# Altium PCB ProPrj_HTXStudio_OneHanded_Keyboard(1).PcbDoc (part 7 of 11)
Units mm, origin at the board's own origin, x right, y up, seen from the top; angles counter-clockwise.
Board outline 152.4 x 101.6 mm, 20 copper layers (F.Cu, F.Mask, B.Cu, B.Mask, In1.Cu, F.SilkS, In2.Cu, B.SilkS, F.Adhes, B.Adhes, F.Paste, B.Paste, Dwgs.User, Cmts.User, Eco1.User, Eco2.User, Edge.Cuts, Margin, B.CrtYd, F.CrtYd); 269 components, 0 nets, 747 pads, 1168 vias.
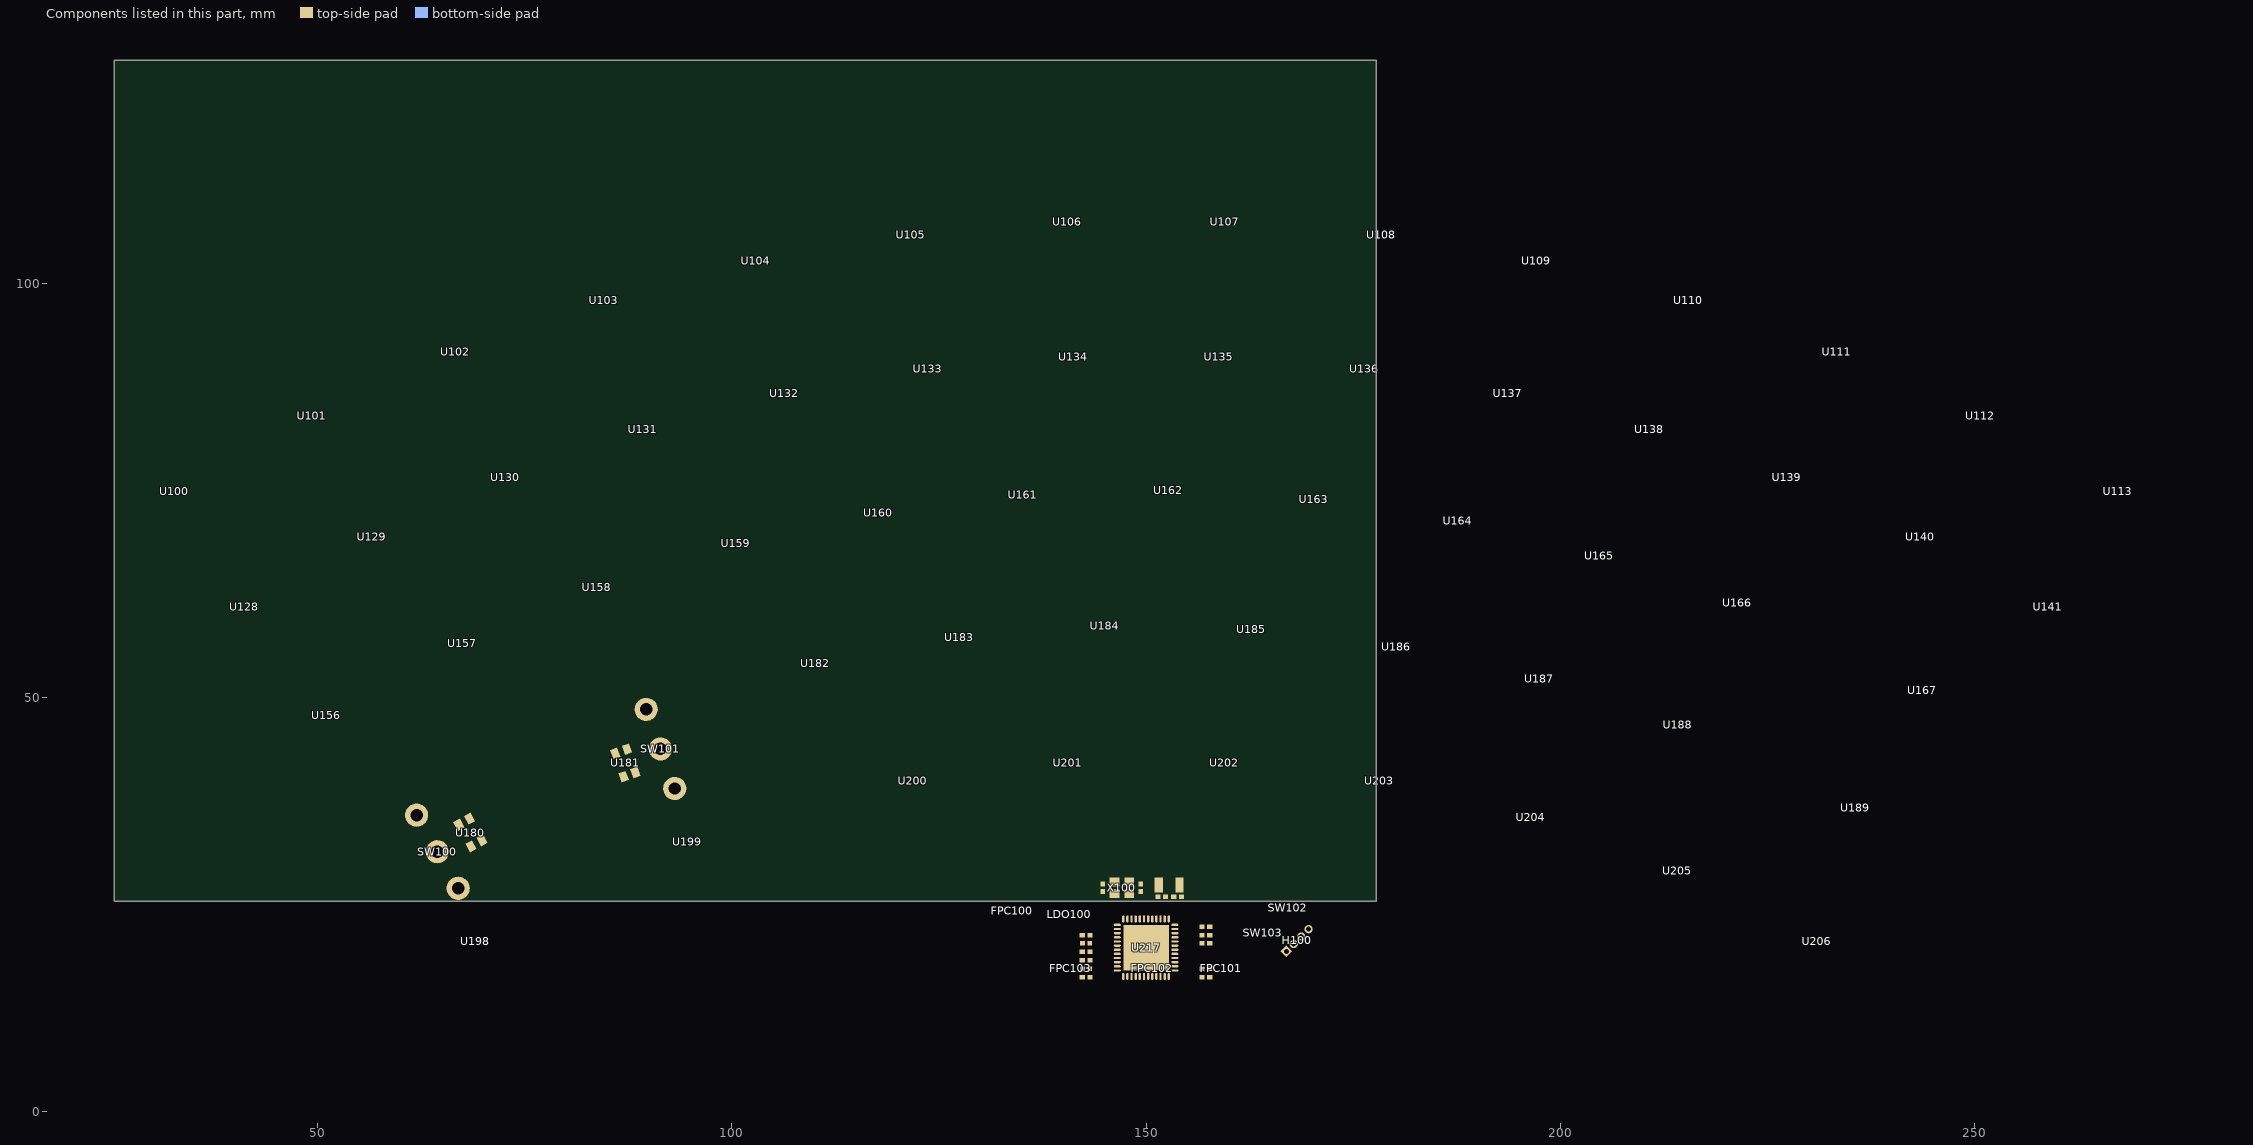
[diagram p19: the components of this part, seen from the top]

## Design rules (kind name [scope] priority, off if disabled: settings) (continued)
PolygonConnect Polygon_F.Cu--3_ConnectRelief45 [IsNamedPolygon('F.Cu--3') vs (IsThruPin or IsSMTPin) and (PadShape_AllLayers = 'Round')] p1214: connectstyle=Relief reliefconductorwidth=0.254 reliefentries=4 polygonreliefangle="45 Angle" airgapwidth=0.254
PolygonConnect Polygon_F.Cu--3_ConnectRelief90 [IsNamedPolygon('F.Cu--3') vs (IsThruPin or IsSMTPin) and (PadShape_AllLayers <> 'Round')] p1215: connectstyle=Relief reliefconductorwidth=0.254 reliefentries=4 polygonreliefangle="90 Angle" airgapwidth=0.254
PolygonConnect Polygon_F.Cu--2_ConnectDirect [IsNamedPolygon('F.Cu--2') vs IsVia] p1216: connectstyle=Direct reliefconductorwidth=0.254 reliefentries=4 polygonreliefangle="90 Angle" airgapwidth=0.254
PolygonConnect Polygon_F.Cu--2_ConnectRelief45 [IsNamedPolygon('F.Cu--2') vs (IsThruPin or IsSMTPin) and (PadShape_AllLayers = 'Round')] p1217: connectstyle=Relief reliefconductorwidth=0.254 reliefentries=4 polygonreliefangle="45 Angle" airgapwidth=0.254
PolygonConnect Polygon_F.Cu--2_ConnectRelief90 [IsNamedPolygon('F.Cu--2') vs (IsThruPin or IsSMTPin) and (PadShape_AllLayers <> 'Round')] p1218: connectstyle=Relief reliefconductorwidth=0.254 reliefentries=4 polygonreliefangle="90 Angle" airgapwidth=0.254
PolygonConnect Polygon_F.Cu--1_ConnectDirect [IsNamedPolygon('F.Cu--1') vs IsVia] p1219: connectstyle=Direct reliefconductorwidth=0.254 reliefentries=4 polygonreliefangle="90 Angle" airgapwidth=0.254
PolygonConnect Polygon_F.Cu--1_ConnectRelief45 [IsNamedPolygon('F.Cu--1') vs (IsThruPin or IsSMTPin) and (PadShape_AllLayers = 'Round')] p1220: connectstyle=Relief reliefconductorwidth=0.5 reliefentries=4 polygonreliefangle="45 Angle" airgapwidth=0.5
PolygonConnect Polygon_F.Cu--1_ConnectRelief90 [IsNamedPolygon('F.Cu--1') vs (IsThruPin or IsSMTPin) and (PadShape_AllLayers <> 'Round')] p1221: connectstyle=Relief reliefconductorwidth=0.5 reliefentries=4 polygonreliefangle="90 Angle" airgapwidth=0.5
PolygonConnect Polygon_F.Cu-_ConnectDirect [IsNamedPolygon('F.Cu-') vs IsVia] p1222: connectstyle=Direct reliefconductorwidth=0.254 reliefentries=4 polygonreliefangle="90 Angle" airgapwidth=0.254
PolygonConnect Polygon_F.Cu-_ConnectRelief45 [IsNamedPolygon('F.Cu-') vs (IsThruPin or IsSMTPin) and (PadShape_AllLayers = 'Round')] p1223: connectstyle=Relief reliefconductorwidth=0.254 reliefentries=4 polygonreliefangle="45 Angle" airgapwidth=0.254
PolygonConnect Polygon_F.Cu-_ConnectRelief90 [IsNamedPolygon('F.Cu-') vs (IsThruPin or IsSMTPin) and (PadShape_AllLayers <> 'Round')] p1224: connectstyle=Relief reliefconductorwidth=0.254 reliefentries=4 polygonreliefangle="90 Angle" airgapwidth=0.254
RoutingVias [All] p1: holewidth=0.711 width=1.27 viastyle="Through Hole" minholewidth=0.711 minwidth=1.27 maxholewidth=0.711 maxwidth=1.27
SilkToSilkClearance [All] p1: silktosilkclearance=0
SilkToSolderMaskClearance [IsPad] p1: minsilkscreentomaskgap=0 clearancetoexposedcopper=TRUE
SolderMaskExpansion [All] p1: expansion=0 istentingtop=FALSE
Width [All] p1: maxlimit=10 minlimit=0.254 preferedwidth=0.254 toplayer_prefwidth=0.2 midlayer1_maxwidth=0.254 midlayer2_prefwidth=0.2 midlayer3_maxwidth=0.254 midlayer4_prefwidth=0.2 midlayer5_prefwidth=0.2 midlayer6_prefwidth=0.2 midlayer7_prefwidth=0.2 midlayer9_maxwidth=0.254 midlayer11_maxwidth=0.254 midlayer13_prefwidth=0.2 midlayer15_prefwidth=0.2 midlayer17_prefwidth=0.2 midlayer19_maxwidth=0.254 midlayer21_maxwidth=0.254 midlayer23_prefwidth=0.2 midlayer25_prefwidth=0.2 midlayer27_maxwidth=0.254 midlayer29_prefwidth=0.2 bottomlayer_prefwidth=0.2 minimp=50.000000 maximp=50.000000 favimp=50.000000
27 further rules are at their usual default settings.

## Components (designator, comment, footprint, x,y, rotation, side; value= is the part's Value field where it differs from the comment)
C100 "Comment" C0603 37.086,77.627 r301.2 top value=100nF
C101 "Comment" C0603 53.924,86.386 r296.4 top value=100nF
C102 "Comment" C0603 71.436,93.706 r291.6 top value=100nF
C103 "Comment" C0603 89.5,99.534 r286.8 top value=100nF
C104 "Comment" C0603 107.987,103.831 r282 top value=100nF
C105 "Comment" C0603 126.77,106.565 r277.2 top value=100nF
C106 "Comment" C0603 145.715,107.719 r272.4 top value=100nF
C107 "Comment" C0603 164.69,107.282 r267.6 top value=100nF
C108 "Comment" C0603 183.563,105.26 r262.8 top value=100nF
C109 "Comment" C0603 202.199,101.666 r258 top value=100nF
C110 "Comment" C0603 220.47,96.524 r253.2 top value=100nF
C111 "Comment" C0603 238.247,89.872 r248.4 top value=100nF
C112 "Comment" C0603 255.404,81.756 r243.6 top value=100nF
C113 "Comment" C0603 271.822,72.232 r238.8 top value=100nF
C114 "Comment" C0603 45.539,63.668 r301.2 top value=100nF
C115 "Comment" C0603 61.18,71.769 r296.4 top value=100nF
C116 "Comment" C0603 77.444,78.532 r291.6 top value=100nF
C117 "Comment" C0603 94.216,83.911 r286.8 top value=100nF
C118 "Comment" C0603 111.38,87.868 r282 top value=100nF
C119 "Comment" C0603 128.815,90.374 r277.2 top value=100nF
C120 "Comment" C0603 146.398,91.414 r272.4 top value=100nF
C121 "Comment" C0603 164.007,90.977 r267.6 top value=100nF
C122 "Comment" C0603 181.517,89.069 r262.8 top value=100nF
C123 "Comment" C0603 198.807,85.703 r258 top value=100nF
C124 "Comment" C0603 215.754,80.901 r253.2 top value=100nF
C125 "Comment" C0603 232.239,74.698 r248.4 top value=100nF
C126 "Comment" C0603 248.148,67.138 r243.6 top value=100nF
C127 "Comment" C0603 263.369,58.273 r238.8 top value=100nF
C128 "Comment" C0603 55.451,50.53 r300.71 top value=100nF
C129 "Comment" C0603 72.141,58.821 r295.2 top value=100nF
C130 "Comment" C0603 88.565,65.146 r290 top value=100nF
C131 "Comment" C0603 105.496,69.956 r284.8 top value=100nF
C132 "Comment" C0603 122.793,73.213 r279.6 top value=100nF
C133 "Comment" C0603 140.313,74.888 r274.4 top value=100nF
C134 "Comment" C0603 157.915,74.969 r269.2 top value=100nF
C135 "Comment" C0603 175.449,73.454 r264 top value=100nF
C136 "Comment" C0603 192.775,70.355 r258.8 top value=100nF
C137 "Comment" C0603 209.749,65.7 r253.6 top value=100nF
C138 "Comment" C0603 226.232,59.525 r248.4 top value=100nF
C139 "Comment" C0603 248.299,48.382 r241.09 top value=100nF
C140 "Comment" C0603 115.12,55.36 r283 top value=100nF
C141 "Comment" C0603 132.597,57.963 r277.3 top value=100nF
C142 "Comment" C0603 150.246,58.817 r271.6 top value=100nF
C143 "Comment" C0603 167.892,57.914 r265.9 top value=100nF
C144 "Comment" C0603 185.362,55.263 r260.2 top value=100nF
C145 "Comment" C0603 202.482,50.89 r254.5 top value=100nF
C146 "Comment" C0603 219.083,44.838 r248.8 top value=100nF
C147 "Comment" C0603 240.234,34.2 r241.16 top value=100nF
C148 "Comment" C0603 73.492,23.216 r300.15 top value=100nF
C149 "Comment" C0603 99.461,34.387 r290.1 top value=100nF
C150 "Comment" C0603 126.981,40.855 r280.05 top value=100nF
C151 "Comment" C0603 145.773,42.45 r273.35 top value=100nF
C152 "Comment" C0603 164.623,41.841 r266.65 top value=100nF
C153 "Comment" C0603 183.273,39.038 r259.95 top value=100nF
C154 "Comment" C0603 201.47,34.077 r253.25 top value=100nF
C155 "Comment" C0603 218.962,27.028 r246.55 top value=100nF
C156 "Comment" C0603 235.513,17.986 r239.85 top value=100nF
C157 "Comment" C0402#1 142.761,21.34 r180 top value=100nF
C158 "Comment" C0402#1 142.761,19.308 r180 top value=100nF
C159 "Comment" C0402#2 162.192,24.007 r225 top value=100nF
C160 "Comment" C0402#1 142.761,16.26 r0 top value=100nF
C161 "Comment" C0402#1 142.761,18.292 r0 top value=100nF
C162 "Comment" C0402#1 157.239,20.324 r180 top value=100nF
C163 "Comment" C0402#1 157.239,17.276 r180 top value=100nF
C164 "Comment" C0402#1 157.239,22.356 r180 top value=100nF
C165 "Comment" C0402#1 157.239,21.34 r180 top value=1uF
C166 "Comment" C0402#1 157.239,16.26 r180 top value=1uF
C167 "Comment" C0402#3 141.745,26.547 r0 top value=100nF
C168 "Comment" C0402#4 139.586,26.547 r180 top value=1uF
C169 "Comment" C0402#4 141.745,21.213 r180 top value=1uF
C170 "Comment" C0402#1 153.81,25.987 r0 top value=6pF
C171 "Comment" C0402#1 144.793,27.055 r90 top value=20pF
C172 "Comment" C0402#1 149.365,27.055 r90 top value=20pF
C173 "Comment" C0402#1 151.905,25.987 r180 top value=6pF
D100 "Comment" SOD-323_L1.8-W1.3-LS2.5-RD 33.076,60.351 r31.2 top value=1N4148WS
D101 "Comment" SOD-323_L1.8-W1.3-LS2.5-RD 48.483,69.507 r26.4 top value=1N4148WS
D102 "Comment" SOD-323_L1.8-W1.3-LS2.5-RD 64.602,77.341 r21.6 top value=1N4148WS
D103 "Comment" SOD-323_L1.8-W1.3-LS2.5-RD 81.32,83.799 r16.8 top value=1N4148WS
D104 "Comment" SOD-323_L1.8-W1.3-LS2.5-RD 98.52,88.835 r12 top value=1N4148WS
D105 "Comment" SOD-323_L1.8-W1.3-LS2.5-RD 116.08,92.414 r7.2 top value=1N4148WS
D106 "Comment" SOD-323_L1.8-W1.3-LS2.5-RD 133.879,94.512 r2.4 top value=1N4148WS
D107 "Comment" SOD-323_L1.8-W1.3-LS2.5-RD 151.791,95.112 r357.6 top value=1N4148WS
D108 "Comment" SOD-323_L1.8-W1.3-LS2.5-RD 169.69,94.212 r352.8 top value=1N4148WS
D109 "Comment" SOD-323_L1.8-W1.3-LS2.5-RD 187.451,91.817 r348 top value=1N4148WS
D110 "Comment" SOD-323_L1.8-W1.3-LS2.5-RD 204.95,87.944 r343.2 top value=1N4148WS
D111 "Comment" SOD-323_L1.8-W1.3-LS2.5-RD 222.062,82.621 r338.4 top value=1N4148WS
D112 "Comment" SOD-323_L1.8-W1.3-LS2.5-RD 238.67,75.884 r333.6 top value=1N4148WS
D113 "Comment" SOD-323_L1.8-W1.3-LS2.5-RD 254.656,67.781 r328.8 top value=1N4148WS
D114 "Comment" SOD-323_L1.8-W1.3-LS2.5-RD 41.531,46.392 r31.2 top value=1N4148WS
D115 "Comment" SOD-323_L1.8-W1.3-LS2.5-RD 55.739,54.889 r26.4 top value=1N4148WS
D116 "Comment" SOD-323_L1.8-W1.3-LS2.5-RD 70.61,62.167 r21.6 top value=1N4148WS
D117 "Comment" SOD-323_L1.8-W1.3-LS2.5-RD 86.037,68.176 r16.8 top value=1N4148WS
D118 "Comment" SOD-323_L1.8-W1.3-LS2.5-RD 101.913,72.872 r12 top value=1N4148WS
D119 "Comment" SOD-323_L1.8-W1.3-LS2.5-RD 118.126,76.224 r7.2 top value=1N4148WS
D120 "Comment" SOD-323_L1.8-W1.3-LS2.5-RD 134.562,78.206 r2.4 top value=1N4148WS
D121 "Comment" SOD-323_L1.8-W1.3-LS2.5-RD 151.108,78.807 r357.6 top value=1N4148WS
D122 "Comment" SOD-323_L1.8-W1.3-LS2.5-RD 167.645,78.021 r352.8 top value=1N4148WS
D123 "Comment" SOD-323_L1.8-W1.3-LS2.5-RD 184.058,75.854 r348 top value=1N4148WS
D124 "Comment" SOD-323_L1.8-W1.3-LS2.5-RD 200.233,72.321 r343.2 top value=1N4148WS
D125 "Comment" SOD-323_L1.8-W1.3-LS2.5-RD 216.055,67.447 r338.4 top value=1N4148WS
D126 "Comment" SOD-323_L1.8-W1.3-LS2.5-RD 231.413,61.266 r333.6 top value=1N4148WS
D127 "Comment" SOD-323_L1.8-W1.3-LS2.5-RD 246.201,53.822 r328.8 top value=1N4148WS
D128 "Comment" SOD-323_L1.8-W1.3-LS2.5-RD 51.293,33.29 r30.71 top value=1N4148WS
D129 "Comment" SOD-323_L1.8-W1.3-LS2.5-RD 66.348,42.059 r25.2 top value=1N4148WS
D130 "Comment" SOD-323_L1.8-W1.3-LS2.5-RD 81.278,48.978 r20 top value=1N4148WS
D131 "Comment" SOD-323_L1.8-W1.3-LS2.5-RD 96.772,54.516 r14.8 top value=1N4148WS
D132 "Comment" SOD-323_L1.8-W1.3-LS2.5-RD 112.706,58.626 r9.6 top value=1N4148WS
D133 "Comment" SOD-323_L1.8-W1.3-LS2.5-RD 128.946,61.276 r4.4 top value=1N4148WS
D134 "Comment" SOD-323_L1.8-W1.3-LS2.5-RD 145.36,62.443 r359.2 top value=1N4148WS
D135 "Comment" SOD-323_L1.8-W1.3-LS2.5-RD 161.812,62.117 r354 top value=1N4148WS
D136 "Comment" SOD-323_L1.8-W1.3-LS2.5-RD 178.166,60.302 r348.8 top value=1N4148WS
D137 "Comment" SOD-323_L1.8-W1.3-LS2.5-RD 194.289,57.011 r343.6 top value=1N4148WS
D138 "Comment" SOD-323_L1.8-W1.3-LS2.5-RD 210.047,52.274 r338.4 top value=1N4148WS
D139 "Comment" SOD-323_L1.8-W1.3-LS2.5-RD 231.323,43.248 r331.09 top value=1N4148WS
D140 "Comment" SOD-323_L1.8-W1.3-LS2.5-RD 52.591,31.246 r29.66 top value=1N4148WS
D141 "Comment" SOD-323_L1.8-W1.3-LS2.5-RD 85.484,47.248 r19.82 top value=1N4148WS
D142 "Comment" SOD-323_L1.8-W1.3-LS2.5-RD 105.916,40.201 r13 top value=1N4148WS
D143 "Comment" SOD-323_L1.8-W1.3-LS2.5-RD 121.933,43.793 r7.3 top value=1N4148WS
D144 "Comment" SOD-323_L1.8-W1.3-LS2.5-RD 138.227,45.776 r1.6 top value=1N4148WS
D145 "Comment" SOD-323_L1.8-W1.3-LS2.5-RD 154.638,46.131 r355.9 top value=1N4148WS
D146 "Comment" SOD-323_L1.8-W1.3-LS2.5-RD 171.003,44.855 r350.2 top value=1N4148WS
D147 "Comment" SOD-323_L1.8-W1.3-LS2.5-RD 187.16,41.959 r344.5 top value=1N4148WS
D148 "Comment" SOD-323_L1.8-W1.3-LS2.5-RD 202.95,37.474 r338.8 top value=1N4148WS
D149 "Comment" SOD-323_L1.8-W1.3-LS2.5-RD 223.265,29.046 r331.16 top value=1N4148WS
D150 "Comment" SOD-323_L1.8-W1.3-LS2.5-RD 69.167,6.017 r30.15 top value=1N4148WS
D151 "Comment" SOD-323_L1.8-W1.3-LS2.5-RD 92.201,18.207 r20.1 top value=1N4148WS
D152 "Comment" SOD-323_L1.8-W1.3-LS2.5-RD 117.009,26.19 r10.05 top value=1N4148WS
D153 "Comment" SOD-323_L1.8-W1.3-LS2.5-RD 134.158,29.048 r3.35 top value=1N4148WS
D154 "Comment" SOD-323_L1.8-W1.3-LS2.5-RD 151.524,29.886 r356.65 top value=1N4148WS
D155 "Comment" SOD-323_L1.8-W1.3-LS2.5-RD 168.869,28.693 r349.95 top value=1N4148WS
D156 "Comment" SOD-323_L1.8-W1.3-LS2.5-RD 185.956,25.483 r343.25 top value=1N4148WS
D157 "Comment" SOD-323_L1.8-W1.3-LS2.5-RD 202.553,20.303 r336.55 top value=1N4148WS
D158 "Comment" SOD-323_L1.8-W1.3-LS2.5-RD 218.431,13.221 r329.85 top value=1N4148WS
D159 "Comment" SOD-523_L1.2-W0.8-LS1.6-RD 139.332,21.213 r180 top value=ESD5Z3V3
FPC100 "Comment" FPC-SMD_8P-P0.50_XUNPU_FPC-05FB-8PH20#1 133.871,24.261 r180 top value=FPC-05FB-8PH20
FPC101 "Comment" FPC-SMD_8P-P0.50_XUNPU_FPC-05FB-8PH20#1 159.086,17.339 r180 top value=FPC-05FB-8PH20
FPC102 "Comment" FPC-SMD_8P-P0.50_XUNPU_FPC-05FB-8PH20#2 150.005,17.339 r180 top value=FPC-05FB-8PH20
FPC103 "Comment" FPC-SMD_8P-P0.50_XUNPU_FPC-05FB-8PH20#1 140.924,17.339 r180 top value=FPC-05FB-8PH20
H100 "Comment" HDR-TH_4P-P1.27-V-M 168.288,20.705 r45 top value=PZ127V-11-04-0720
LDO100 "Comment" SOT-23-5_L3.0-W1.7-P0.95-LS2.8-BL 140.729,23.88 r0 top value=ME6211C33M5G-N
LED100 "Comment" LED0603-RD_1 171.336,24.007 r45 top value=NCD0603G1
R100 "Comment" R0402#1 142.761,20.324 r0 top value=0Ω
R101 "Comment" R0402#1 142.761,17.276 r0 top value=0Ω
R102 "Comment" R0402#2 163.716,25.531 r45 top value=10kΩ
R103 "Comment" R0402#2 160.668,22.483 r225 top value=10kΩ
R104 "Comment" R0402#2 170.066,25.658 r315 top value=1kΩ
SW100 "Comment" SW-TH_K9-1267T 64.423,31.401 r119.66 top value=K9-1267T
SW101 "Comment" SW-TH_K9-1267T 91.362,43.815 r109.81 top value=K9-1267T
SW102 "Comment" SW-SMD_4P-L3.7-W3.7-P2.70-LS3.7 167.145,24.642 r45 top value="TS3735A 250gf 030"
SW103 "Comment" SW-SMD_4P-L3.7-W3.7-P2.70-LS3.7 164.097,21.594 r45 top value="TS3735A 250gf 030"
U100 "Comment" LED-SMD_L3.2-W2.8_YO-WS2812B-3528 32.631,74.929 r31.2 top value=Yo-WS2812B-3528反贴雾状
U101 "Comment" LED-SMD_L3.2-W2.8_YO-WS2812B-3528 49.26,84.071 r26.4 top value=Yo-WS2812B-3528反贴雾状
U102 "Comment" LED-SMD_L3.2-W2.8_YO-WS2812B-3528 66.595,91.789 r21.6 top value=Yo-WS2812B-3528反贴雾状
U103 "Comment" LED-SMD_L3.2-W2.8_YO-WS2812B-3528 84.514,98.029 r16.8 top value=Yo-WS2812B-3528反贴雾状
U104 "Comment" LED-SMD_L3.2-W2.8_YO-WS2812B-3528 102.894,102.748 r12 top value=Yo-WS2812B-3528反贴雾状
U105 "Comment" LED-SMD_L3.2-W2.8_YO-WS2812B-3528 121.604,105.913 r7.2 top value=Yo-WS2812B-3528反贴雾状
U106 "Comment" LED-SMD_L3.2-W2.8_YO-WS2812B-3528 140.513,107.5 r2.4 top value=Yo-WS2812B-3528反贴雾状
U107 "Comment" LED-SMD_L3.2-W2.8_YO-WS2812B-3528 159.487,107.5 r357.6 top value=Yo-WS2812B-3528反贴雾状
U108 "Comment" LED-SMD_L3.2-W2.8_YO-WS2812B-3528 178.397,105.913 r352.8 top value=Yo-WS2812B-3528反贴雾状
U109 "Comment" LED-SMD_L3.2-W2.8_YO-WS2812B-3528 197.106,102.748 r348 top value=Yo-WS2812B-3528反贴雾状
U110 "Comment" LED-SMD_L3.2-W2.8_YO-WS2812B-3528 215.485,98.029 r343.2 top value=Yo-WS2812B-3528反贴雾状
U111 "Comment" LED-SMD_L3.2-W2.8_YO-WS2812B-3528 233.405,91.789 r338.4 top value=Yo-WS2812B-3528反贴雾状
U112 "Comment" LED-SMD_L3.2-W2.8_YO-WS2812B-3528 250.74,84.071 r333.6 top value=Yo-WS2812B-3528反贴雾状
U113 "Comment" LED-SMD_L3.2-W2.8_YO-WS2812B-3528 267.369,74.929 r328.8 top value=Yo-WS2812B-3528反贴雾状
U114 "Comment" SMD_KEYBOARD-SW 37.561,67.967 r211.2 top value=CPG151101S11-16
U115 "Comment" SMD_KEYBOARD-SW 53.59,76.721 r206.4 top value=CPG151101S11-16
U116 "Comment" SMD_KEYBOARD-SW 70.294,84.102 r201.6 top value=CPG151101S11-16
U117 "Comment" SMD_KEYBOARD-SW 87.558,90.06 r196.8 top value=CPG151101S11-16
U118 "Comment" SMD_KEYBOARD-SW 105.26,94.552 r192 top value=CPG151101S11-16
U119 "Comment" SMD_KEYBOARD-SW 123.275,97.547 r187.2 top value=CPG151101S11-16
U120 "Comment" SMD_KEYBOARD-SW 141.478,99.025 r182.4 top value=CPG151101S11-16
U121 "Comment" SMD_KEYBOARD-SW 159.741,98.973 r177.6 top value=CPG151101S11-16
U122 "Comment" SMD_KEYBOARD-SW 177.935,97.394 r172.8 top value=CPG151101S11-16
U123 "Comment" SMD_KEYBOARD-SW 195.934,94.298 r168 top value=CPG151101S11-16
U124 "Comment" SMD_KEYBOARD-SW 213.61,89.707 r163.2 top value=CPG151101S11-16
U125 "Comment" SMD_KEYBOARD-SW 230.84,83.653 r158.4 top value=CPG151101S11-16
U126 "Comment" SMD_KEYBOARD-SW 247.503,76.178 r153.6 top value=CPG151101S11-16
U127 "Comment" SMD_KEYBOARD-SW 263.483,67.335 r148.8 top value=CPG151101S11-16
U128 "Comment" LED-SMD_L3.2-W2.8_YO-WS2812B-3528 41.086,60.97 r31.2 top value=Yo-WS2812B-3528反贴雾状
U129 "Comment" LED-SMD_L3.2-W2.8_YO-WS2812B-3528 56.516,69.453 r26.4 top value=Yo-WS2812B-3528反贴雾状
U130 "Comment" LED-SMD_L3.2-W2.8_YO-WS2812B-3528 72.602,76.615 r21.6 top value=Yo-WS2812B-3528反贴雾状
U131 "Comment" LED-SMD_L3.2-W2.8_YO-WS2812B-3528 89.232,82.407 r16.8 top value=Yo-WS2812B-3528反贴雾状
U132 "Comment" LED-SMD_L3.2-W2.8_YO-WS2812B-3528 106.287,86.785 r12 top value=Yo-WS2812B-3528反贴雾状
U133 "Comment" LED-SMD_L3.2-W2.8_YO-WS2812B-3528 123.649,89.722 r7.2 top value=Yo-WS2812B-3528反贴雾状
U134 "Comment" LED-SMD_L3.2-W2.8_YO-WS2812B-3528 141.196,91.195 r2.4 top value=Yo-WS2812B-3528反贴雾状
U135 "Comment" LED-SMD_L3.2-W2.8_YO-WS2812B-3528 158.805,91.195 r357.6 top value=Yo-WS2812B-3528反贴雾状
U136 "Comment" LED-SMD_L3.2-W2.8_YO-WS2812B-3528 176.351,89.722 r352.8 top value=Yo-WS2812B-3528反贴雾状
U137 "Comment" LED-SMD_L3.2-W2.8_YO-WS2812B-3528 193.713,86.785 r348 top value=Yo-WS2812B-3528反贴雾状
U138 "Comment" LED-SMD_L3.2-W2.8_YO-WS2812B-3528 210.768,82.407 r343.2 top value=Yo-WS2812B-3528反贴雾状
U139 "Comment" LED-SMD_L3.2-W2.8_YO-WS2812B-3528 227.398,76.615 r338.4 top value=Yo-WS2812B-3528反贴雾状
U140 "Comment" LED-SMD_L3.2-W2.8_YO-WS2812B-3528 243.484,69.453 r333.6 top value=Yo-WS2812B-3528反贴雾状
U141 "Comment" LED-SMD_L3.2-W2.8_YO-WS2812B-3528 258.915,60.97 r328.8 top value=Yo-WS2812B-3528反贴雾状
U142 "Comment" SMD_KEYBOARD-SW 46.016,54.009 r211.2 top value=CPG151101S11-16
U143 "Comment" SMD_KEYBOARD-SW 60.846,62.103 r206.4 top value=CPG151101S11-16
U144 "Comment" SMD_KEYBOARD-SW 76.302,68.928 r201.6 top value=CPG151101S11-16
U145 "Comment" SMD_KEYBOARD-SW 92.275,74.437 r196.8 top value=CPG151101S11-16
U146 "Comment" SMD_KEYBOARD-SW 108.653,78.589 r192 top value=CPG151101S11-16
U147 "Comment" SMD_KEYBOARD-SW 125.321,81.356 r187.2 top value=CPG151101S11-16
U148 "Comment" SMD_KEYBOARD-SW 142.161,82.719 r182.4 top value=CPG151101S11-16
U149 "Comment" SMD_KEYBOARD-SW 159.058,82.668 r177.6 top value=CPG151101S11-16
U150 "Comment" SMD_KEYBOARD-SW 175.89,81.204 r172.8 top value=CPG151101S11-16
U151 "Comment" SMD_KEYBOARD-SW 192.541,78.335 r168 top value=CPG151101S11-16
U152 "Comment" SMD_KEYBOARD-SW 208.893,74.085 r163.2 top value=CPG151101S11-16
U153 "Comment" SMD_KEYBOARD-SW 224.832,68.479 r158.4 top value=CPG151101S11-16
U154 "Comment" SMD_KEYBOARD-SW 240.247,61.56 r153.6 top value=CPG151101S11-16
U155 "Comment" SMD_KEYBOARD-SW 255.028,53.376 r148.8 top value=CPG151101S11-16
U156 "Comment" LED-SMD_L3.2-W2.8_YO-WS2812B-3528 50.973,47.871 r30.71 top value=Yo-WS2812B-3528反贴雾状
U157 "Comment" LED-SMD_L3.2-W2.8_YO-WS2812B-3528 67.429,56.603 r25.2 top value=Yo-WS2812B-3528反贴雾状
U158 "Comment" LED-SMD_L3.2-W2.8_YO-WS2812B-3528 83.672,63.365 r20 top value=Yo-WS2812B-3528反贴雾状
U159 "Comment" LED-SMD_L3.2-W2.8_YO-WS2812B-3528 100.462,68.626 r14.8 top value=Yo-WS2812B-3528反贴雾状
U160 "Comment" LED-SMD_L3.2-W2.8_YO-WS2812B-3528 117.658,72.344 r9.6 top value=Yo-WS2812B-3528反贴雾状
U161 "Comment" LED-SMD_L3.2-W2.8_YO-WS2812B-3528 135.122,74.489 r4.4 top value=Yo-WS2812B-3528反贴雾状
U162 "Comment" LED-SMD_L3.2-W2.8_YO-WS2812B-3528 152.708,75.041 r359.2 top value=Yo-WS2812B-3528反贴雾状
U163 "Comment" LED-SMD_L3.2-W2.8_YO-WS2812B-3528 170.271,73.998 r354 top value=Yo-WS2812B-3528反贴雾状
U164 "Comment" LED-SMD_L3.2-W2.8_YO-WS2812B-3528 187.668,71.367 r348.8 top value=Yo-WS2812B-3528反贴雾状
U165 "Comment" LED-SMD_L3.2-W2.8_YO-WS2812B-3528 204.754,67.17 r343.6 top value=Yo-WS2812B-3528反贴雾状
U166 "Comment" LED-SMD_L3.2-W2.8_YO-WS2812B-3528 221.39,61.442 r338.4 top value=Yo-WS2812B-3528反贴雾状
U167 "Comment" LED-SMD_L3.2-W2.8_YO-WS2812B-3528 243.74,50.899 r331.09 top value=Yo-WS2812B-3528反贴雾状
U168 "Comment" SMD_KEYBOARD-SW 55.843,40.867 r210.71 top value=CPG151101S11-16
U169 "Comment" SMD_KEYBOARD-SW 71.604,49.164 r205.2 top value=CPG151101S11-16
U170 "Comment" SMD_KEYBOARD-SW 87.156,55.578 r200 top value=CPG151101S11-16
U171 "Comment" SMD_KEYBOARD-SW 103.225,60.555 r194.8 top value=CPG151101S11-16
U172 "Comment" SMD_KEYBOARD-SW 119.679,64.056 r189.6 top value=CPG151101S11-16
U173 "Comment" SMD_KEYBOARD-SW 136.383,66.052 r184.4 top value=CPG151101S11-16
U174 "Comment" SMD_KEYBOARD-SW 153.199,66.525 r179.2 top value=CPG151101S11-16
U175 "Comment" SMD_KEYBOARD-SW 169.988,65.472 r174 top value=CPG151101S11-16
U176 "Comment" SMD_KEYBOARD-SW 186.614,62.901 r168.8 top value=CPG151101S11-16
U177 "Comment" SMD_KEYBOARD-SW 202.937,58.835 r163.6 top value=CPG151101S11-16
U178 "Comment" SMD_KEYBOARD-SW 218.825,53.306 r158.4 top value=CPG151101S11-16
U179 "Comment" SMD_KEYBOARD-SW 240.162,43.156 r151.09 top value=CPG151101S11-16
U180 "Comment" LED-SMD_4P-L3.5-W2.8-BR-1 68.408,33.723 r119.66 top value=XL-3528RGBC-WS2812B
U181 "Comment" LED-SMD_4P-L3.5-W2.8-BR-1 87.117,42.126 r109.81 top value=XL-3528RGBC-WS2812B
U182 "Comment" LED-SMD_L3.2-W2.8_YO-WS2812B-3528 110.047,54.189 r13 top value=Yo-WS2812B-3528反贴雾状
U183 "Comment" LED-SMD_L3.2-W2.8_YO-WS2812B-3528 127.432,57.301 r7.3 top value=Yo-WS2812B-3528反贴雾状
U184 "Comment" LED-SMD_L3.2-W2.8_YO-WS2812B-3528 145.041,58.671 r1.6 top value=Yo-WS2812B-3528反贴雾状
U185 "Comment" LED-SMD_L3.2-W2.8_YO-WS2812B-3528 162.699,58.287 r355.9 top value=Yo-WS2812B-3528反贴雾状
U186 "Comment" LED-SMD_L3.2-W2.8_YO-WS2812B-3528 180.231,56.149 r350.2 top value=Yo-WS2812B-3528反贴雾状
U187 "Comment" LED-SMD_L3.2-W2.8_YO-WS2812B-3528 197.464,52.281 r344.5 top value=Yo-WS2812B-3528反贴雾状
U188 "Comment" LED-SMD_L3.2-W2.8_YO-WS2812B-3528 214.228,46.721 r338.8 top value=Yo-WS2812B-3528反贴雾状
U189 "Comment" LED-SMD_L3.2-W2.8_YO-WS2812B-3528 235.673,36.712 r331.16 top value=Yo-WS2812B-3528反贴雾状
U190 "Comment" SMD_KEYBOARD-SW 112.555,46.035 r193 top value=CPG151101S11-16
U191 "Comment" SMD_KEYBOARD-SW 129.118,48.939 r187.3 top value=CPG151101S11-16
U192 "Comment" SMD_KEYBOARD-SW 145.888,50.183 r181.6 top value=CPG151101S11-16
U193 "Comment" SMD_KEYBOARD-SW 162.699,49.755 r175.9 top value=CPG151101S11-16
U194 "Comment" SMD_KEYBOARD-SW 179.383,47.66 r170.2 top value=CPG151101S11-16
U195 "Comment" SMD_KEYBOARD-SW 195.778,43.919 r164.5 top value=CPG151101S11-16
U196 "Comment" SMD_KEYBOARD-SW 211.72,38.567 r158.8 top value=CPG151101S11-16
U197 "Comment" SMD_KEYBOARD-SW 232.102,28.964 r151.16 top value=CPG151101S11-16
U198 "Comment" LED-SMD_L3.2-W2.8_YO-WS2812B-3528 68.989,20.601 r30.15 top value=Yo-WS2812B-3528反贴雾状
U199 "Comment" LED-SMD_L3.2-W2.8_YO-WS2812B-3528 94.571,32.598 r20.1 top value=Yo-WS2812B-3528反贴雾状
U200 "Comment" LED-SMD_L3.2-W2.8_YO-WS2812B-3528 121.854,39.946 r10.05 top value=Yo-WS2812B-3528反贴雾状
U201 "Comment" LED-SMD_L3.2-W2.8_YO-WS2812B-3528 140.575,42.146 r3.35 top value=Yo-WS2812B-3528反贴雾状
U202 "Comment" LED-SMD_L3.2-W2.8_YO-WS2812B-3528 159.425,42.146 r356.65 top value=Yo-WS2812B-3528反贴雾状
U203 "Comment" LED-SMD_L3.2-W2.8_YO-WS2812B-3528 178.146,39.946 r349.95 top value=Yo-WS2812B-3528反贴雾状
U204 "Comment" LED-SMD_L3.2-W2.8_YO-WS2812B-3528 196.483,35.578 r343.25 top value=Yo-WS2812B-3528反贴雾状
U205 "Comment" LED-SMD_L3.2-W2.8_YO-WS2812B-3528 214.185,29.1 r336.55 top value=Yo-WS2812B-3528反贴雾状
U206 "Comment" LED-SMD_L3.2-W2.8_YO-WS2812B-3528 231.011,20.601 r329.85 top value=Yo-WS2812B-3528反贴雾状
U207 "Comment" SMD_KEYBOARD-SW 73.791,13.549 r210.15 top value=CPG151101S11-16
U208 "Comment" SMD_KEYBOARD-SW 98.069,24.817 r200.1 top value=CPG151101S11-16
U209 "Comment" SMD_KEYBOARD-SW 123.94,31.674 r190.05 top value=CPG151101S11-16
U210 "Comment" SMD_KEYBOARD-SW 141.681,33.687 r183.35 top value=CPG151101S11-16
U211 "Comment" SMD_KEYBOARD-SW 159.537,33.616 r176.65 top value=CPG151101S11-16
U212 "Comment" SMD_KEYBOARD-SW 177.262,31.461 r169.95 top value=CPG151101S11-16
U213 "Comment" SMD_KEYBOARD-SW 194.615,27.254 r163.25 top value=CPG151101S11-16
U214 "Comment" SMD_KEYBOARD-SW 211.359,21.051 r156.55 top value=CPG151101S11-16
U215 "Comment" SMD_KEYBOARD-SW 227.264,12.937 r149.85 top value=CPG151101S11-16
U217 "Comment" VQFN-48_L7.0-W7.0-P0.50-BL-EP5.5 150.005,19.816 r180 top value=STM32G431CBU6
X100 "Comment" CRYSTAL-SMD_4P-L3.2-W2.5-BL 147.079,27.055 r0 top value=8MHz
X101 "Comment" FC-135R_L3.2-W1.5 152.794,27.39 r0 top value=32.768kHz

## Footprints (in the part's own frame and the unit in brackets; to place one, negate y for a bottom-side part, rotate by r counter-clockwise, add the part's x,y. Pads: shape width x height; smd on the part's side, far side on the other; paste and mask are expansions set on the pad)
C0402#1 [mm]
  rect 0.63x0.54 smd paste-0.63 mask-0.63: 1(-0.465,0) 2(0.465,0)
  F.SilkS lines w0.254: 0.226,0.499 0.74,0.499 ; 0.226,-0.499 0.74,-0.499 0.734,-0.499 ccw(c0.733,-0.288) 0.944,-0.288 0.944,0.295 ccw(c0.74,0.295) 0.74,0.498 ; -0.226,0.499 -0.734,0.499 ; -0.226,-0.499 -0.734,-0.499 -0.74,-0.499 cw(c-0.74,-0.295) -0.944,-0.295 ; -0.944,0.288 cw(c-0.733,0.288) -0.734,0.499 ; 0.74,0.499 0.734,0.499 0.74,0.499 ; -0.734,0.499 -0.74,0.499 -0.734,0.499 ; -0.944,-0.295 -0.944,0.295 -0.944,-0.295
  F.Paste region: -0.135,0.23 -0.135,-0.23 -0.175,-0.27 -0.676,-0.27 -0.716,-0.23 -0.716,0.23 -0.676,0.27 -0.175,0.27
  F.Paste region: 0.716,0.23 0.716,-0.23 0.676,-0.27 0.175,-0.27 0.135,-0.23 0.135,0.23 0.175,0.27 0.676,0.27
  F.CrtYd lines w0.254: 1.03,0.526 -1.03,0.526 -1.03,-0.555 1.03,-0.555 1.03,0.526
C0402#2 [mm]
  rect 0.63x0.54 on Mid2 paste-0.63 mask-0.63: 1(-0.465,0) 2(0.465,0)
  B.SilkS lines w0.254: 0.226,-0.498 0.74,-0.498 ; -0.226,-0.498 -0.734,-0.499 ; 0.226,0.498 0.74,0.498 0.734,0.499 cw(c0.734,0.289) 0.944,0.288 0.944,-0.295 cw(c0.74,-0.295) 0.74,-0.498 ; -0.226,0.498 -0.734,0.499 -0.74,0.498 ccw(c-0.74,0.295) -0.944,0.295 ; 0.74,-0.498 0.734,-0.499 0.74,-0.498 ; -0.734,-0.499 cw(c-0.734,-0.289) -0.944,-0.288 ; -0.734,-0.499 -0.74,-0.498 -0.734,-0.499 ; -0.944,-0.288 -0.944,0.295 ; -0.944,-0.288 -0.944,0.295
  B.Paste region: -0.135,0.23 -0.135,-0.23 -0.175,-0.27 -0.676,-0.27 -0.716,-0.23 -0.716,0.23 -0.676,0.27 -0.175,0.27
  B.Paste region: 0.716,0.23 0.716,-0.23 0.676,-0.27 0.175,-0.27 0.135,-0.23 0.135,0.23 0.175,0.27 0.676,0.27
  B.CrtYd region: 1.03,-0.526 -1.03,-0.526 -1.03,0.555 1.03,0.555
C0402#3 [mm]
  rect 0.63x0.54 on Mid2 paste-0.63 mask-0.63: 1(-0.465,0) 2(0.465,0)
  B.SilkS lines w0.254: -0.944,-0.288 ccw(c-0.734,-0.289) -0.734,-0.499 -0.74,-0.499 -0.226,-0.499 ; -0.226,0.499 -0.74,0.499 ; 0.226,-0.499 0.734,-0.499 ; 0.226,0.499 0.734,0.499 ; -0.944,0.295 cw(c-0.74,0.295) -0.74,0.498 ; -0.944,0.295 -0.944,-0.295 -0.944,0.295 ; -0.74,0.499 -0.734,0.499 -0.74,0.499 ; 0.734,-0.499 0.74,-0.499 ; 0.734,-0.499 0.74,-0.499 ; 0.734,0.499 cw(c0.734,0.289) 0.944,0.288 0.944,-0.295 cw(c0.74,-0.295) 0.74,-0.498 ; 0.734,0.499 0.74,0.499 0.734,0.499
  B.Paste region: 0.716,0.23 0.716,-0.23 0.676,-0.27 0.175,-0.27 0.135,-0.23 0.135,0.23 0.175,0.27 0.676,0.27
  B.Paste region: -0.135,0.23 -0.135,-0.23 -0.175,-0.27 -0.676,-0.27 -0.716,-0.23 -0.716,0.23 -0.676,0.27 -0.175,0.27
  B.CrtYd lines w0.254: -1.03,-0.526 1.03,-0.526 1.03,0.555 -1.03,0.555 -1.03,-0.526
C0402#4 [mm]
  rect 0.63x0.54 on Mid2 paste-0.63 mask-0.63: 1(-0.465,0) 2(0.465,0)
  B.SilkS lines w0.254: 0.226,0.499 0.74,0.499 0.734,0.499 cw(c0.734,0.289) 0.944,0.288 0.944,-0.295 cw(c0.74,-0.295) 0.74,-0.498 ; 0.226,-0.499 0.74,-0.499 ; -0.226,0.499 -0.734,0.499 -0.74,0.499 ccw(c-0.74,0.295) -0.944,0.295 ; -0.226,-0.499 -0.734,-0.499 ; 0.74,-0.499 0.734,-0.499 0.74,-0.499 ; -0.734,-0.499 cw(c-0.734,-0.289) -0.944,-0.288 ; -0.734,-0.499 -0.74,-0.499 -0.734,-0.499 ; -0.944,0.295 -0.944,-0.288 ; -0.944,0.295 -0.944,-0.288
  B.Paste region: -0.135,0.23 -0.135,-0.23 -0.175,-0.27 -0.676,-0.27 -0.716,-0.23 -0.716,0.23 -0.676,0.27 -0.175,0.27
  B.Paste region: 0.716,0.23 0.716,-0.23 0.676,-0.27 0.175,-0.27 0.135,-0.23 0.135,0.23 0.175,0.27 0.676,0.27
  B.CrtYd lines w0.254: 1.03,0.555 1.03,-0.526 -1.03,-0.526 -1.03,0.555 1.03,0.555
C0603 [mm]
  rect 0.8x0.9 on Mid2 paste-0.9 mask-0.9: 1(-0.7,0) 2(0.7,0)
  B.SilkS lines w0.254: -0.28,-0.71 -1.08,-0.71 cw(c-1.08,-0.4) -1.39,-0.4 -1.39,-0.4 -1.39,0.399 cw(c-1.08,0.399) -1.08,0.709 -0.28,0.71 ; 0.28,-0.709 1.08,-0.709 ccw(c1.081,-0.4) 1.39,-0.4 1.39,0.4 ; 0.28,0.71 1.08,0.71 cw(c1.08,0.4) 1.39,0.4 ; 1.39,0.4 1.39,0.4
  B.CrtYd region: 1.35,-0.7 -1.35,-0.7 -1.35,0.705 1.35,0.705
CRYSTAL-SMD_4P-L3.2-W2.5-BL [mm]
  rect 1.2x1.1 smd paste-1.2 mask-1.2: 1(-0.899,-0.712) 2(0.899,-0.712) 3(0.899,0.712) 4(-0.899,0.712)
  F.SilkS lines w0.254: -1.689,-1.439 1.689,-1.439 1.689,1.439 -1.689,1.439 -1.689,-1.439
  Dwgs.User circle w0.254: c-1.143,-1.143 r0.127
  Dwgs.User region: 1.143,-0.762 0.635,-0.762 0.635,-0.635 1.143,-0.635
  Dwgs.User region: -0.826,0.318 -0.953,0.318 -0.953,0.826 -0.826,0.826
  Dwgs.User region: -0.635,0.508 -1.143,0.508 -1.143,0.635 -0.635,0.635
  F.CrtYd lines w0.254: -1.749,-1.512 1.749,-1.512 1.749,1.512 -1.749,1.512 -1.749,-1.512
FC-135R_L3.2-W1.5 [mm]
  rect 1x1.8 smd paste-1.8 mask-1.8: 1(-1.25,0) 2(1.25,0)
  F.SilkS lines w0.254: -0.508,-0.762 0.508,-0.762 ; -0.508,0.762 0.508,0.762
  F.CrtYd lines w0.254: -2.055,-1.205 2.026,-1.205 2.026,1.175 -2.055,1.175 -2.055,-1.205
FPC-SMD_8P-P0.50_XUNPU_FPC-05FB-8PH20#1 [mm]
  rect 0.3x1.2 on Mid2 paste-1.2 mask-1.2: 1(1.75,-1.625) 2(1.25,-1.625) 3(0.75,-1.625) 4(0.25,-1.625) 5(-0.25,-1.625) 6(-0.75,-1.625) 7(-1.25,-1.625) 8(-1.75,-1.625)
  rect 2x1.8 on Mid2 paste-2 mask-2: 9(-3.3,1.625) 10(3.3,1.625)
  B.SilkS circle w0.254: c2.5,-2 r0.133
  B.SilkS lines w0.254: 3.75,3.556 3.75,2.756 ; 3.75,0.494 3.75,-1.5 2.131,-1.5 ; 3.556,3.556 -3.753,3.556 -3.753,2.756 ; -2.131,-1.524 -3.753,-1.524 -3.753,0.494
  Dwgs.User circle w0.254: c2.032,-2.159 r0.15
  B.CrtYd lines w0.254: 4.55,3.802 4.55,-2.475 -4.55,-2.475 -4.55,3.802 4.55,3.802
FPC-SMD_8P-P0.50_XUNPU_FPC-05FB-8PH20#2 [mm]
  rect 0.3x1.2 on Mid2 paste-1.2 mask-1.2: 1(1.75,-1.625) 2(1.25,-1.625) 3(0.75,-1.625) 4(0.25,-1.625) 5(-0.25,-1.625) 6(-0.75,-1.625) 7(-1.25,-1.625) 8(-1.75,-1.625)
  rect 2x1.8 on Mid2 paste-2 mask-2: 9(-3.3,1.625)
  B.Cu region: 4.302,0.729 4.299,0.726 3.088,0.726 2.774,0.412 2.299,0.412 2.299,0.413 2.299,2.213 2.299,2.214 4.302,2.214
  B.Mask region: 4.302,0.729 4.299,0.726 3.088,0.726 2.774,0.412 2.299,0.412 2.299,0.413 2.299,2.213 2.299,2.214 4.302,2.214
  B.SilkS circle w0.254: c2.5,-2 r0.133
  B.SilkS lines w0.254: 3.75,3.556 3.75,2.756 ; 3.75,0.494 3.75,-1.5 2.131,-1.5 ; 3.556,3.556 -3.753,3.556 -3.753,2.756 ; -2.131,-1.524 -3.753,-1.524 -3.753,0.494
  B.Paste region: 4.302,0.729 4.299,0.726 3.088,0.726 2.774,0.412 2.299,0.412 2.299,0.413 2.299,2.213 2.299,2.214 4.302,2.214
  Dwgs.User circle w0.254: c2.032,-2.159 r0.15
  B.CrtYd lines w0.254: 4.551,3.802 4.551,-2.475 -4.55,-2.475 -4.55,3.802 4.551,3.802
HDR-TH_4P-P1.27-V-M [mm]
  rect 1x1 hole 0.6 paste-2539.97 mask-1: 1(-1.905,0)
  round 1 hole 0.6 paste-2539.97 mask-1: 2(-0.635,0) 3(0.635,0) 4(1.905,0)
  B.SilkS lines w0.254: -2.54,0.687 -2.54,1 2.54,1 2.54,0.36 ; -2.54,-0.687 -2.54,-1 2.54,-1 2.54,-0.36
  B.CrtYd region: 2.816,-1.275 -2.845,-1.275 -2.845,1.305 2.816,1.305
LED0603-RD_1 [mm]
  rect 0.8x0.8 on Mid2 paste-0.8 mask-0.8: 1(-0.799,0.004) 2(0.799,-0.004)
  B.SilkS lines w0.254: -0.139,0.746 -1.189,0.746 -1.489,0.446 -1.489,0.346 -1.489,-0.354 -1.489,-0.454 -1.189,-0.754 -0.139,-0.754 ; 0.241,0.744 1.39,0.744 1.39,-0.757 0.241,-0.757 ; 0.077,0.376 0.077,-0.386 ; -0.176,-0.012 0.078,-0.012
  Dwgs.User region: 0.815,-0.279 0.665,-0.279 0.666,0.322 0.816,0.322
  Dwgs.User region: 1.051,-0.055 0.45,-0.055 0.45,0.095 1.05,0.095
  Dwgs.User region: -0.649,-0.055 -1.25,-0.055 -1.249,0.095 -0.649,0.095
  B.CrtYd region: 1.449,-0.711 -1.449,-0.711 -1.449,0.67 1.449,0.67
LED-SMD_4P-L3.5-W2.8-BR-1 [mm]
  rect 1.2x0.9 smd paste-1.2 mask-1.2: 1(1.5,-0.75) 2(1.5,0.75) 3(-1.5,0.75) 4(-1.5,-0.75)
  F.SilkS circle w0.254: c2.159,-1.524 r0.127
  F.SilkS circle w0.254: c0,0 r0.762
  F.SilkS lines w0.254: 1.6,1.4 -1.6,1.4 ; 0.381,0.254 0.127,0.254 ; -0.127,0.254 -0.381,0.254 ; 0.381,-0.254 0.127,-0.254 ; 1.778,-1.4 1.6,-1.4 -1.6,-1.4
  F.CrtYd region: 2.35,-1.705 -2.35,-1.705 -2.35,1.675 2.35,1.675
LED-SMD_L3.2-W2.8_YO-WS2812B-3528 [mm]
  rect 1.5x0.82 on Mid2 paste-1.5 mask-1.5: 1(2.8,-0.75) 2(2.8,0.75) 3(-2.8,0.75) 4(-2.8,-0.75)
  B.SilkS circle w0.254: c0,0 r0.992
  B.SilkS region: -2.03,1.322 -2.03,1.83 -1.522,1.83
  B.SilkS lines w0.254: -1.6,1.274 -1.6,1.4 1.6,1.4 1.6,1.273 ; -1.6,0.226 -1.6,-0.226 ; -1.6,-1.273 -1.6,-1.4 1.6,-1.4 1.6,-1.274 ; 1.6,0.226 1.6,-0.226
  Dwgs.User region: -1.6,0.2 -1.6,1.4 -0.4,1.4
  B.CrtYd region: 3.8,-1.851 -3.8,-1.85 -3.8,1.851 3.8,1.85
R0402#1 [mm]
  rect 0.566x0.54 smd paste-0.566 mask-0.566: 1(-0.433,0) 2(0.433,0)
  F.SilkS lines w0.254: -0.226,-0.499 -0.944,-0.499 -0.944,0.499 -0.226,0.499 ; 0.226,-0.499 0.944,-0.499 0.944,0.499 0.226,0.499
  F.Paste region: 0.716,0.23 0.716,-0.23 0.676,-0.27 0.175,-0.27 0.135,-0.23 0.135,0.23 0.175,0.27 0.676,0.27
  F.Paste region: -0.135,0.23 -0.135,-0.23 -0.175,-0.27 -0.676,-0.27 -0.716,-0.23 -0.716,0.23 -0.676,0.27 -0.175,0.27
  F.CrtYd lines w0.254: -0.966,-0.555 0.966,-0.555 0.966,0.526 -0.966,0.526 -0.966,-0.555
R0402#2 [mm]
  rect 0.566x0.54 on Mid2 paste-0.566 mask-0.566: 1(-0.433,0) 2(0.433,0)
  B.SilkS lines w0.254: -0.226,0.498 -0.944,0.499 -0.944,-0.499 -0.226,-0.498 ; 0.226,0.498 0.944,0.499 0.944,-0.499 0.226,-0.498
  B.Paste region: 0.716,0.23 0.716,-0.23 0.676,-0.27 0.175,-0.27 0.135,-0.23 0.135,0.23 0.175,0.27 0.676,0.27
  B.Paste region: -0.135,0.23 -0.135,-0.23 -0.175,-0.27 -0.676,-0.27 -0.716,-0.23 -0.716,0.23 -0.676,0.27 -0.175,0.27
  B.CrtYd region: 0.966,-0.525 -0.966,-0.525 -0.966,0.555 0.966,0.555
SMD_KEYBOARD-SW [mm]
  rect 2.5x2.55 on Mid2 paste-2.55 mask-2.55: 1(-6.725,-1.27) 2(6.725,1.27)
  F.SilkS lines w0.254: 6.96,-7.62 6.96,-10.16 4.42,-10.16 ; 6.96,0 6.96,2.54 4.42,2.54 ; -3.2,-10.16 -5.74,-10.16 -5.74,-7.62 ; -3.2,2.54 -5.74,2.54 -5.74,0 ; 8.233,-11.43 8.233,3.81 -7.007,3.81 -7.007,-11.43 8.233,-11.43
  B.SilkS lines w0.254: 5.5,-0.236 5.5,-0.8 5.5,-1.05 1.19,-1.05 0.15,-1.05 -0.1,-1.05 ccw(c0.57,-3.62) -2,-2.95 -5.5,-2.95 -5.5,-2.776 -5.5,0.637 cw(c-3.197,0.637) -3.196,2.94 -3.187,2.95 5.5,2.95 ; 5.5,2.776 5.5,2.95 ; 5.49,2.94 ccw(c5.49,2.95) 5.5,2.95
  Dwgs.User circle w0.254: c-3.2,-1.27 r0.725
  Dwgs.User circle w0.254: c3.2,1.27 r0.725
  Dwgs.User region: 7.61,-10.81 -6.39,-10.81 -6.39,3.19 7.61,3.19
  Edge.Cuts region: 0.999,-1.854 1.251,-1.922 1.492,-2.022 1.718,-2.152 1.925,-2.311 2.109,-2.495 2.268,-2.702 2.398,-2.928 2.498,-3.169 2.566,-3.421 2.6,-3.68 2.6,-3.94 2.566,-4.199 2.498,-4.451 2.398,-4.692 2.268,-4.918 2.109,-5.125 1.925,-5.309 1.718,-5.468 1.492,-5.598 1.251,-5.698 0.999,-5.766 0.74,-5.8 0.48,-5.8 0.221,-5.766 -0.031,-5.698 -0.272,-5.598 -0.498,-5.468 -0.705,-5.309 -0.889,-5.125 -1.048,-4.918 -1.178,-4.692 -1.278,-4.451 -1.346,-4.199 -1.38,-3.94 -1.38,-3.68 -1.346,-3.421 -1.278,-3.169 -1.178,-2.928 -1.048,-2.702 -0.889,-2.495 -0.705,-2.311 -0.498,-2.152 -0.272,-2.022 -0.031,-1.922 0.221,-1.854 0.48,-1.82 0.74,-1.82
  Edge.Cuts region: -2.85,0.189 -2.626,0.116 -2.416,0.009 -2.226,-0.129 -2.059,-0.296 -1.921,-0.486 -1.814,-0.696 -1.741,-0.92 -1.705,-1.152 -1.705,-1.388 -1.741,-1.62 -1.814,-1.844 -1.921,-2.054 -2.059,-2.244 -2.226,-2.411 -2.416,-2.549 -2.626,-2.656 -2.85,-2.729 -3.082,-2.765 -3.318,-2.765 -3.55,-2.729 -3.774,-2.656 -3.984,-2.549 -4.174,-2.411 -4.341,-2.244 -4.479,-2.054 -4.586,-1.844 -4.659,-1.62 -4.695,-1.388 -4.695,-1.152 -4.659,-0.92 -4.586,-0.696 -4.479,-0.486 -4.341,-0.296 -4.174,-0.129 -3.984,0.009 -3.774,0.116 -3.55,0.189 -3.318,0.225 -3.082,0.225
  Edge.Cuts region: 3.55,2.729 3.774,2.656 3.984,2.549 4.174,2.411 4.341,2.244 4.479,2.054 4.586,1.844 4.659,1.62 4.695,1.388 4.695,1.152 4.659,0.92 4.586,0.696 4.479,0.486 4.341,0.296 4.174,0.129 3.984,-0.009 3.774,-0.116 3.55,-0.189 3.318,-0.225 3.082,-0.225 2.85,-0.189 2.626,-0.116 2.416,-0.009 2.226,0.129 2.059,0.296 1.921,0.486 1.814,0.696 1.741,0.92 1.705,1.152 1.705,1.388 1.741,1.62 1.814,1.844 1.921,2.054 2.059,2.244 2.226,2.411 2.416,2.549 2.626,2.656 2.85,2.729 3.082,2.765 3.318,2.765
  Edge.Cuts region: -4.223,-2.996 -4.069,-3.059 -3.93,-3.152 -3.812,-3.27 -3.719,-3.409 -3.656,-3.563 -3.623,-3.727 -3.623,-3.893 -3.656,-4.057 -3.719,-4.211 -3.812,-4.35 -3.93,-4.468 -4.069,-4.561 -4.223,-4.624 -4.387,-4.657 -4.553,-4.657 -4.717,-4.624 -4.871,-4.561 -5.01,-4.468 -5.128,-4.35 -5.221,-4.211 -5.284,-4.057 -5.317,-3.893 -5.317,-3.727 -5.284,-3.563 -5.221,-3.409 -5.128,-3.27 -5.01,-3.152 -4.871,-3.059 -4.717,-2.996 -4.553,-2.963 -4.387,-2.963
  Edge.Cuts region: 5.937,-2.996 6.091,-3.059 6.23,-3.152 6.348,-3.27 6.441,-3.409 6.504,-3.563 6.537,-3.727 6.537,-3.893 6.504,-4.057 6.441,-4.211 6.348,-4.35 6.23,-4.468 6.091,-4.561 5.937,-4.624 5.773,-4.657 5.607,-4.657 5.443,-4.624 5.289,-4.561 5.15,-4.468 5.032,-4.35 4.939,-4.211 4.876,-4.057 4.843,-3.893 4.843,-3.727 4.876,-3.563 4.939,-3.409 5.032,-3.27 5.15,-3.152 5.289,-3.059 5.443,-2.996 5.607,-2.963 5.773,-2.963
  B.CrtYd region: 9.737,-12.937 -8.517,-12.937 -8.517,5.317 9.737,5.317
SOD-323_L1.8-W1.3-LS2.5-RD [mm]
  rect 1x0.75 on Mid2 paste-1 mask-1: 1(-1.173,0) 2(1.173,0)
  B.SilkS region: -0.775,-0.802 -1.08,-0.803 -1.08,-0.45 -0.775,-0.45
  B.SilkS region: -0.775,0.45 -1.08,0.45 -1.08,0.803 -0.775,0.803
  B.SilkS lines w0.254: -0.851,0.726 0.901,0.726 0.901,0.52 ; -0.447,0.726 -0.447,-0.726 ; -0.851,-0.726 0.901,-0.726 0.901,-0.53
  Dwgs.User region: 1.083,-0.53 0.927,-0.53 0.927,0.51 1.083,0.51
  Dwgs.User region: 1.315,-0.09 0.691,-0.09 0.691,0.066 1.315,0.066
  Dwgs.User region: -0.601,-0.07 -1.225,-0.07 -1.225,0.086 -0.601,0.086
  B.CrtYd region: 1.922,-0.926 -1.923,-0.926 -1.923,0.955 1.923,0.955
SOD-523_L1.2-W0.8-LS1.6-RD [mm]
  rect 0.93x0.36 on Mid2 paste-0.93 mask-0.93: 1(-0.635,0) 2(0.635,0)
  B.SilkS region: -0.6,-0.553 -0.905,-0.553 -0.905,-0.333 -0.6,-0.333
  B.SilkS region: -0.56,0.332 -0.864,0.332 -0.864,0.552 -0.56,0.552
  B.SilkS lines w0.254: 0.676,0.476 -0.676,0.476 -0.914,0.476 -0.914,0.363 ; 0.676,-0.476 -0.676,-0.476 -0.914,-0.476 -0.914,-0.356
  Dwgs.User region: -0.503,-0.055 -0.887,-0.055 -0.887,0.041 -0.503,0.041
  Dwgs.User region: 0.736,-0.32 0.64,-0.32 0.64,0.32 0.736,0.32
  Dwgs.User region: 0.88,-0.048 0.496,-0.048 0.496,0.048 0.88,0.048
  B.CrtYd lines w0.254: 1.35,0.705 1.35,-0.676 -1.35,-0.676 -1.35,0.705 1.35,0.705
SOT-23-5_L3.0-W1.7-P0.95-LS2.8-BL [mm]
  rect 0.49x1.157 on Mid2 paste-1.157 mask-1.157: 1(-0.95,1.154) 2(0,1.154) 3(0.95,1.154)
  rect 0.49x1.175 on Mid2 paste-1.175 mask-1.175: 4(0.95,-1.154) 5(-0.95,-1.154)
  B.SilkS circle w0.254: c-1.651,1.143 r0.15
  B.SilkS lines w0.254: -1.526,-0.851 -1.526,0.851 ; -0.476,-0.851 0.476,-0.851 ; 1.526,-0.851 1.526,0.851
  Dwgs.User circle w0.254: c-0.95,1.763 r0.1
  B.CrtYd lines w0.254: -1.726,-1.991 1.726,-1.991 1.726,1.982 -1.726,1.982 -1.726,-1.991
SW-SMD_4P-L3.7-W3.7-P2.70-LS3.7 [mm]
  rect 0.65x0.65 on Mid2 paste-0.65 mask-0.65: 1(-1.6,-1.35) 2(1.6,-1.35) 3(-1.6,1.35) 4(1.6,1.35)
  B.SilkS circle w0.254: c-2.18,-0.84 r0.1
  B.SilkS lines w0.254: -1.051,1.85 1.051,1.85 ; -1.85,0.794 -1.85,-0.794 ; -1.839,0.57 -1.85,0.57 -1.614,0.794 ; -0.969,1.439 -0.559,1.85 ; -1.85,-0.615 -1.85,-0.521 -1.67,-0.794 ; 0.645,1.85 0.969,1.526 ; -0.969,-1.496 -0.615,-1.85 ; -1.051,-1.85 1.051,-1.85 ; 1.701,0.794 1.85,0.645 1.85,0.354 ; 1.85,0.794 1.85,-0.794 ; 0.636,-1.85 0.97,-1.516 ; 1.692,-0.794 1.85,-0.587 1.85,-0.636
  Dwgs.User region: 0.06,-0.83 0.06,-1.23 -0.11,-1.23 -0.11,-0.86 -0.69,-0.01 -0.55,0.1
  Dwgs.User region: 1.14,-1.44 -1.1,-1.44 -1.1,-1.27 1.14,-1.27
  Dwgs.User region: 0.065,0.25 -0.105,0.25 -0.105,1.21 0.065,1.21
  Dwgs.User region: 1.14,1.26 -1.1,1.26 -1.1,1.43 1.14,1.43
  B.CrtYd region: 2.175,-2.155 -2.175,-2.155 -2.175,2.126 2.175,2.126
SW-TH_K9-1267T [mm]
  round 2.8 hole 1.5 paste-2539.97 mask-2.8: 1(-5.08,0) 2(0,0) 3(5.08,0)
  F.SilkS lines w0.254: 6.35,2 -5,2 -5,1.629 ; 5.777,2 5.777,1.474 ; 4.925,2 4.925,1.624 ; 6.35,1.022 6.35,2.8 -6.35,2.8 -6.35,1.022 ; 3.691,2 3.691,0.854 ; 6.35,-1.022 6.35,-2.8 -6.35,-2.8 -6.35,-1.022 ; 5.777,-1.474 5.778,-1.801 ; 6.35,-1.801 -5.001,-1.801 -5,-1.629 ; 1.516,0.6 2.4,0.6 2.4,-0.6 1.516,-0.6 ; 3.691,-0.854 3.691,-1.801 ; 4.925,-1.624 4.925,-1.801 ; -1.516,0.6 -3.564,0.6 ; -1.516,-0.6 -3.564,-0.6
  F.CrtYd region: 6.756,-3.232 -6.785,-3.232 -6.785,3.202 6.756,3.203
VQFN-48_L7.0-W7.0-P0.50-BL-EP5.5 [mm]
  rrect100% 0.28x0.85 smd paste-0.85 mask-0.85: 1(-2.75,-3.474) 2(-2.25,-3.474) 3(-1.75,-3.474) 4(-1.25,-3.474) 5(-0.75,-3.474) 6(-0.25,-3.474) 7(0.25,-3.474) 8(0.75,-3.474) 9(1.25,-3.474) 10(1.75,-3.474) 11(2.25,-3.474) 12(2.75,-3.474) 25(2.75,3.474) 26(2.25,3.474) 27(1.75,3.474) 28(1.25,3.474) 29(0.75,3.474) 30(0.25,3.474) 31(-0.25,3.474) 32(-0.75,3.474) 33(-1.25,3.474) 34(-1.75,3.474) 35(-2.25,3.474) 36(-2.75,3.474)
  rrect100% 0.85x0.28 smd paste-0.85 mask-0.85: 13(3.474,-2.75) 14(3.474,-2.25) 15(3.474,-1.75) 16(3.474,-1.25) 17(3.474,-0.75) 18(3.474,-0.25) 19(3.474,0.25) 20(3.474,0.75) 21(3.474,1.25) 22(3.474,1.75) 23(3.474,2.25) 24(3.474,2.75) 37(-3.474,2.75) 38(-3.474,2.25) 39(-3.474,1.75) 40(-3.474,1.25) 41(-3.474,0.75) 42(-3.474,0.25) 43(-3.474,-0.25) 44(-3.474,-0.75) 45(-3.474,-1.25) 46(-3.474,-1.75) 47(-3.474,-2.25) 48(-3.474,-2.75)
  rect 5.5x5.5 smd paste-5.5 mask-5.5: 49(0,0)
  F.SilkS circle w0.254: c-3.302,-4.064 r0.1
  F.SilkS region: -3.25,-3.7 -3.7,-3.7 -3.7,-3.25
  F.SilkS lines w0.254: 3.7,3.25 3.7,3.7 3.25,3.7 ; 3.7,-3.25 3.7,-3.7 3.25,-3.7 ; -3.25,3.7 -3.7,3.7 -3.7,3.25 ; -3.25,-3.7 -3.7,-3.7 -3.7,-3.25
  F.Paste region: 2.2,-2.2 -2.2,-2.2 -2.2,2.2 2.2,2.2
  Dwgs.User circle w0.254: c-2.794,-3.556 r0.15
  F.CrtYd lines w0.254: 4.149,4.149 -4.149,4.149 -4.149,-4.149 4.149,-4.149 4.149,4.149